# Altium PCB Tran_RF1.PcbDoc
Units mm, origin at the board's own origin, x right, y up, seen from the top; angles counter-clockwise.
Board outline 127 x 101.6 mm, 2 copper layers (Top Layer, Bottom Layer); 74 components, 22 nets, 332 pads, 18 vias.
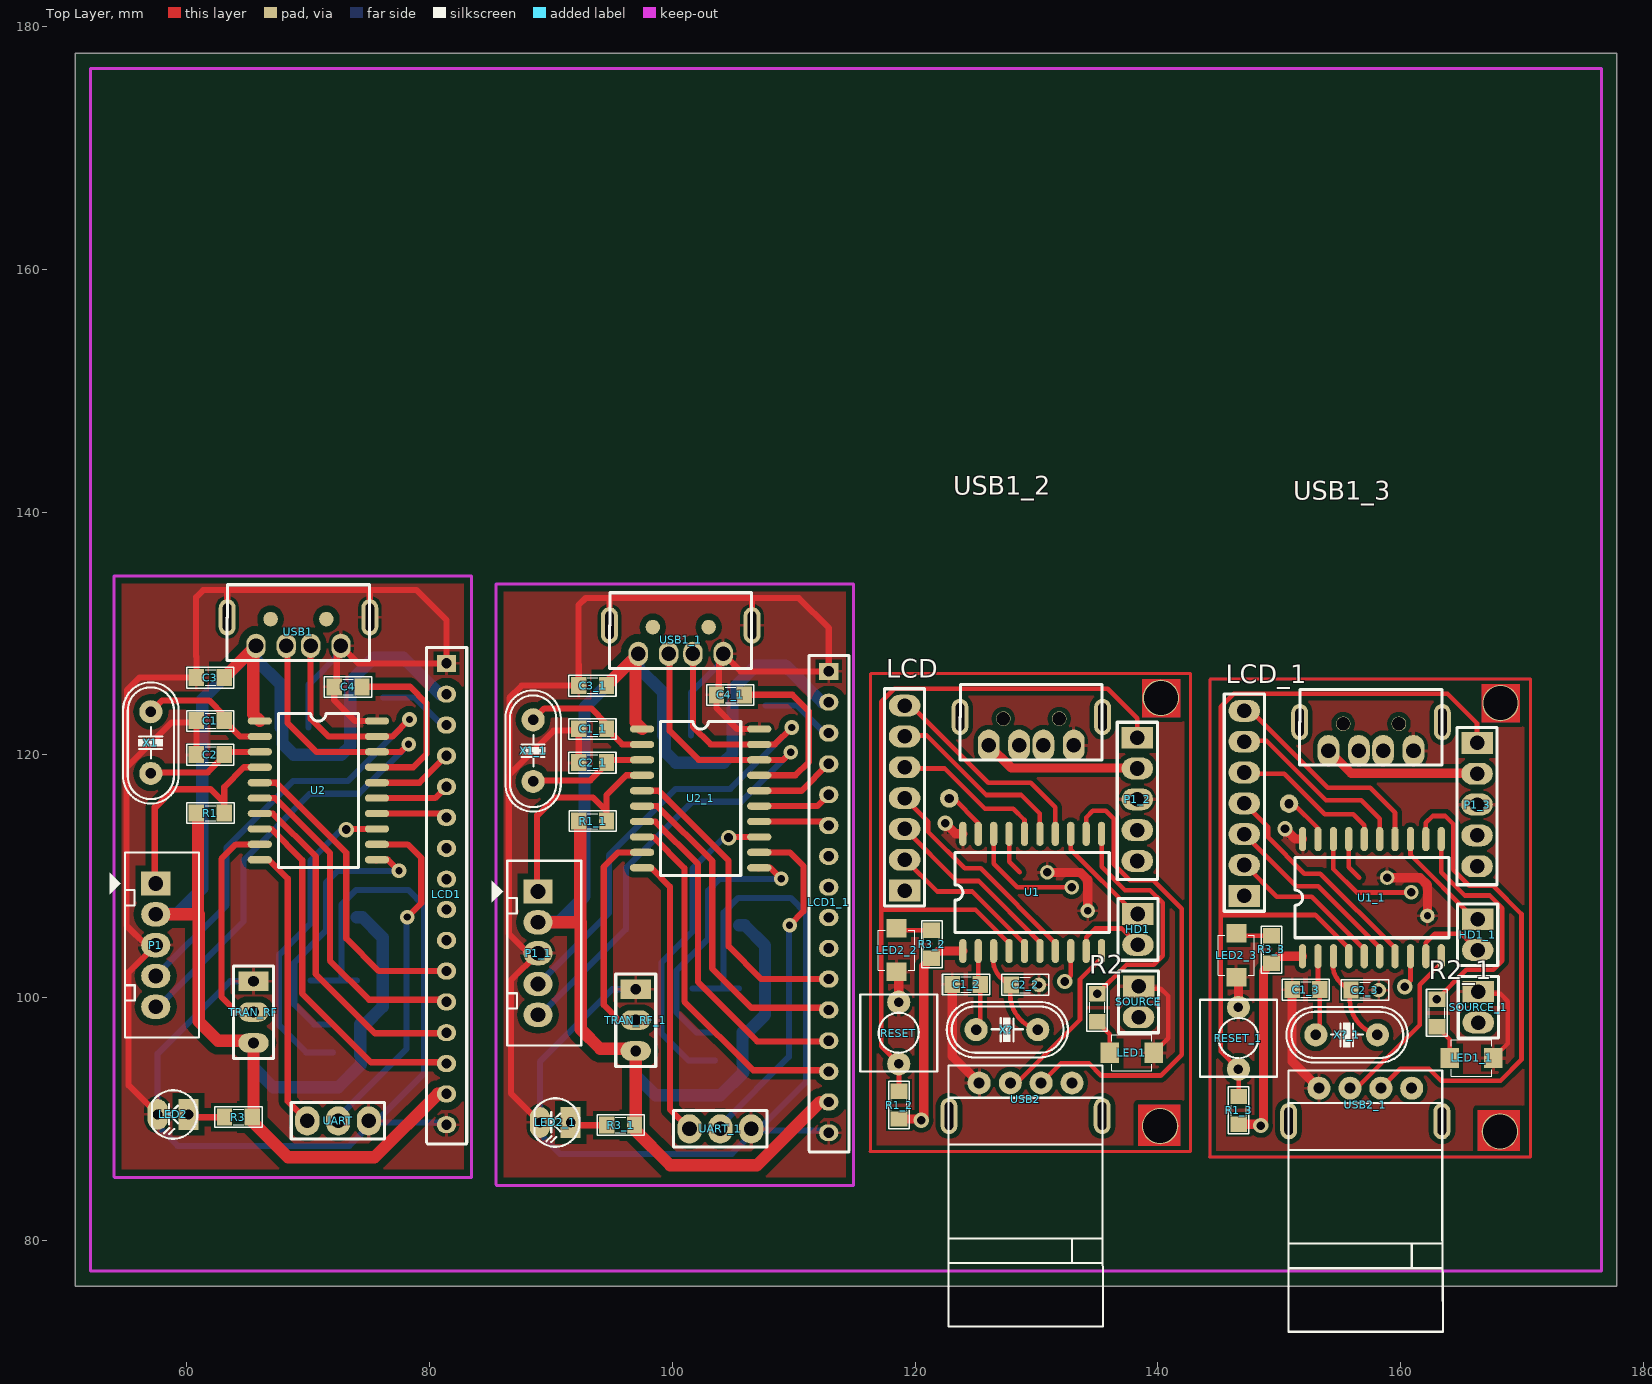
[diagram p0: Top Layer view]
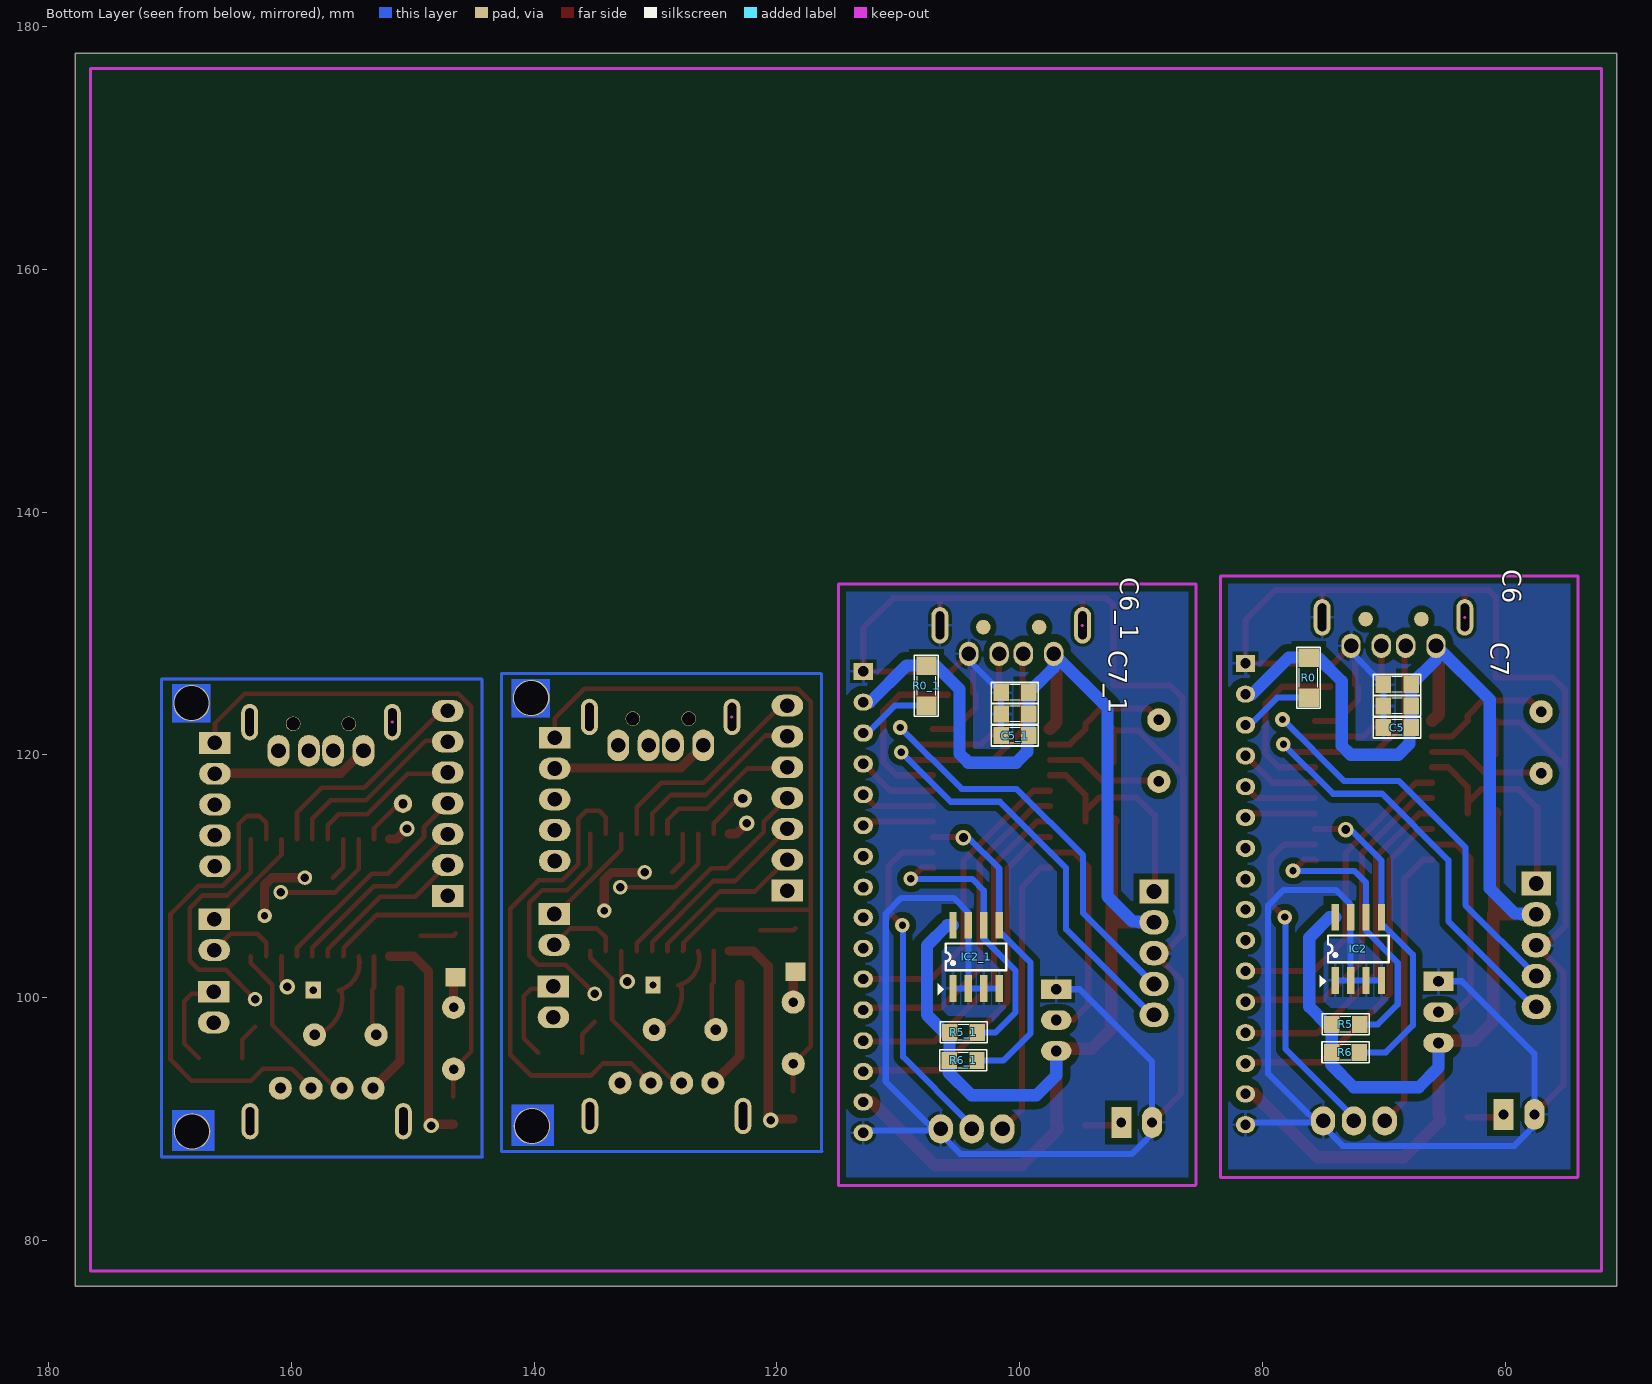
[diagram p1: Bottom Layer view, seen from below]
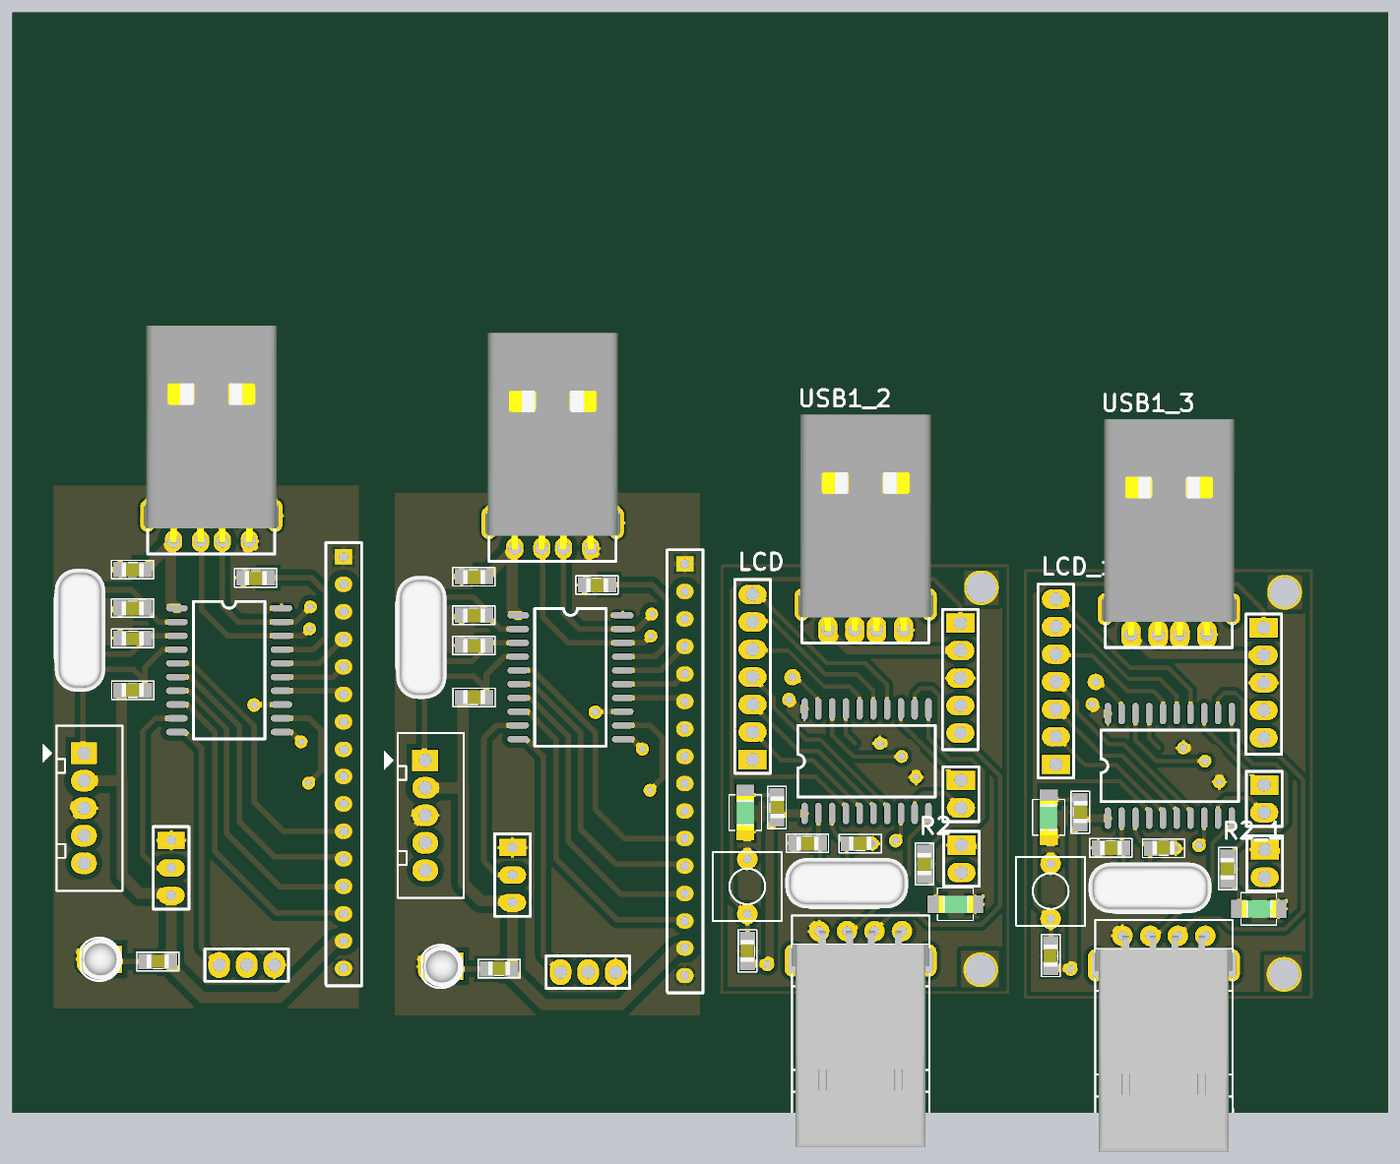
[diagram p2: 3D render of the assembled board from above, using the file's embedded part models]
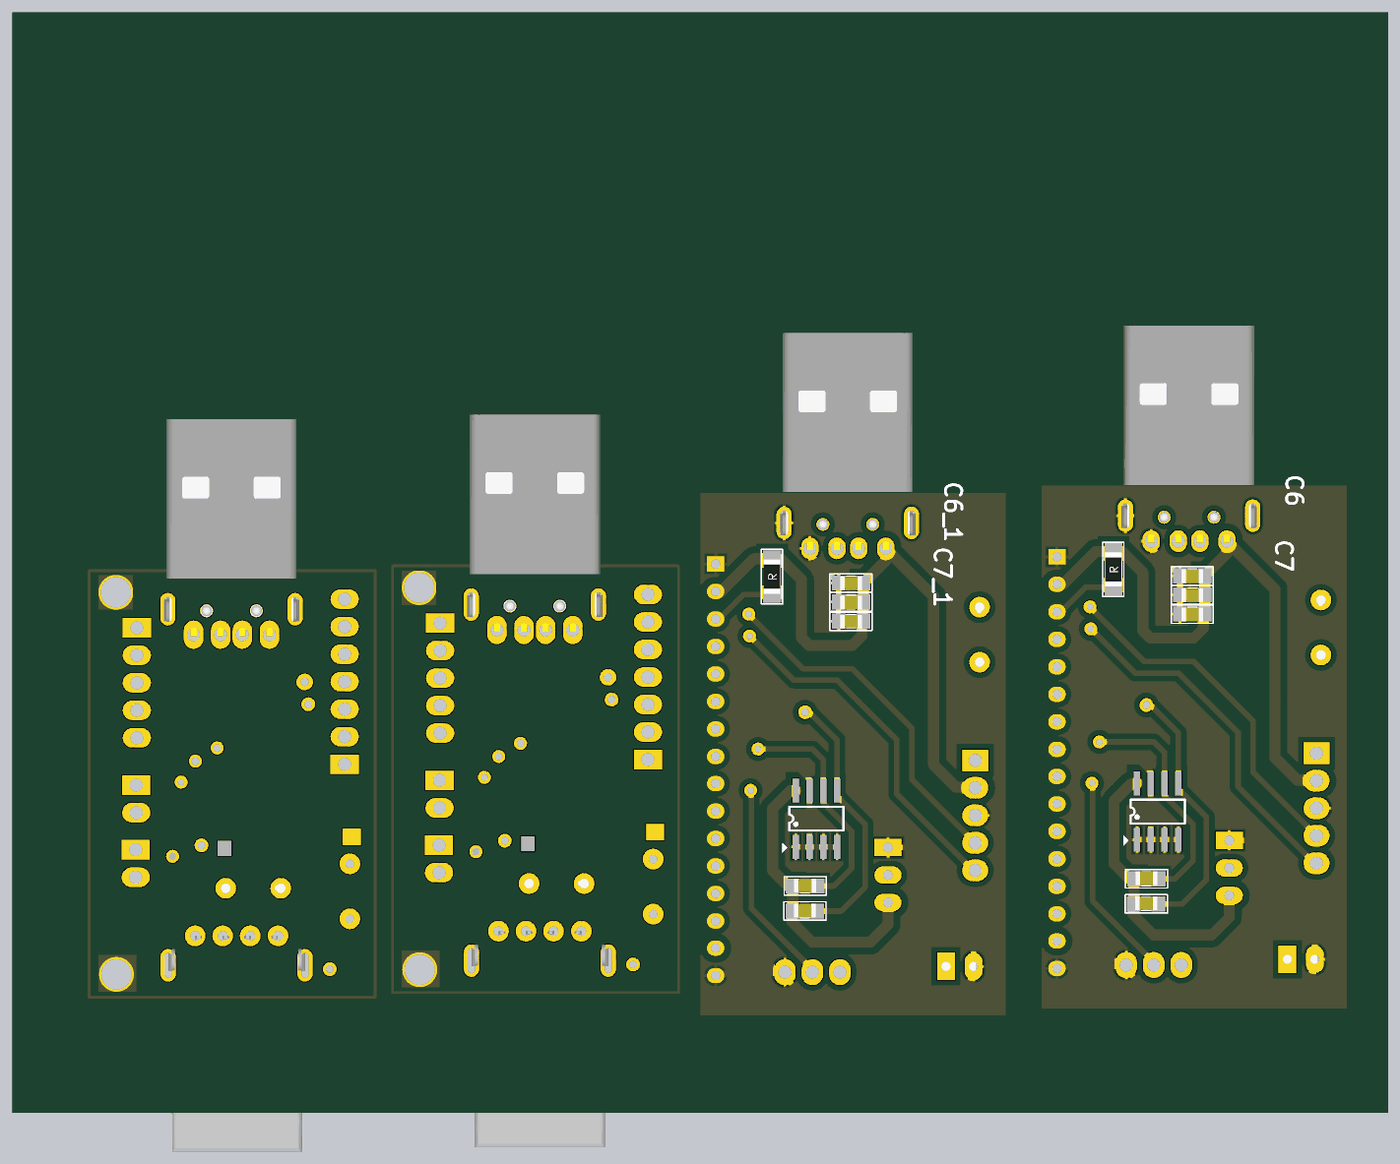
[diagram p3: 3D render of the assembled board from below, using the file's embedded part models]

## Layer stack, top to bottom
Top Layer: signal copper 0.0356
Dielectric: core 0.32, FR-4, Dk 4.8
Bottom Layer: signal copper 0.0356

## Board outline
50.8,76.2 177.8,76.2 177.8,177.8 50.8,177.8

## Design rules (kind name [scope] priority, off if disabled: settings)
Clearance VCC [InNet('VCC')] p1: gap=0.635
Clearance [All] p2: gap=0.508
PolygonConnect [All] p1: connectstyle=Relief reliefconductorwidth=0.254 reliefentries=4 polygonreliefangle="90 Angle" airgapwidth=0.254
RoomDefinition Tran_RF [InComponentClass('Tran_RF')] p1: confinementstyle=ConfineIn formatcopy=TRUE lockcomponents=FALSE outline 0,0 50.8,0 50.8,25.4 0,25.4
RoutingVias [All] p1: holewidth=0.635 width=1.016 viastyle="Through Hole" minholewidth=0.711 minwidth=1.27 maxholewidth=0.711 maxwidth=1.27
SolderMaskExpansion [All] p1: expansion=0.102
Width VCC_1 [InNet('VCC')] p1: maxlimit=1.016 minlimit=1.016 preferedwidth=1.016
Width [All] p2: maxlimit=0.508 minlimit=0.508 preferedwidth=0.508
28 further rules are at their usual default settings.

## Classes and differential pairs
component class Tran_RF: C1 C2 C3 C4 C5 C6 C7 IC2 LCD1 LED2 P1 R0 R1 R3 R5 R6 TRAN_RF U2 UART USB1 X1

## Components (designator, comment, footprint, x,y, rotation, side; value= is the part's Value field where it differs from the comment)
C1 "33pF" SM-0805#1 61.925,122.809 r0 top
C1_1 "33pF" SM-0805#1 93.421,122.149 r0 top (schematic designator C1)
C1_2 "33pF" SM-0805#1 124.206,101.092 r0 top (schematic designator C1)
C1_3 "33pF" SM-0805#1 152.197,100.66 r0 top (schematic designator C1)
C2 "33pF" SM-0805#1 61.925,120.015 r0 top
C2_1 "33pF" SM-0805#1 93.421,119.355 r0 top (schematic designator C2)
C2_2 "33pF" SM-0805#2 129.057,101.041 r180 top (schematic designator C2)
C2_3 "33pF" SM-0805#2 157.048,100.609 r180 top (schematic designator C2)
C3 "103" SM-0805#1 61.925,126.365 r0 top
C3_1 "103" SM-0805#1 93.421,125.705 r0 top (schematic designator C3)
C4 "103" SM-0805#1 73.279,125.603 r0 top
C4_1 "103" SM-0805#1 104.775,124.943 r0 top (schematic designator C4)
C5 "103" SM-0805#1 68.885,122.25 r180 bottom
C5_1 "103" SM-0805#1 100.381,121.59 r180 bottom (schematic designator C5)
C6 "103" SM-0805#1 68.885,124.028 r180 bottom
C6_1 "103" SM-0805#1 100.381,123.368 r180 bottom (schematic designator C6)
C7 "103" SM-0805#1 68.885,125.781 r180 bottom
C7_1 "103" SM-0805#1 100.381,125.12 r180 bottom (schematic designator C7)
HD1 "Header 2" HEADER1x2 138.354,106.883 r270 top
HD1_1 "Header 2" HEADER1x2 166.345,106.451 r270 top (schematic designator HD1)
IC2 "24Cxx" SO-G8 72.085,104.013 r180 bottom
IC2_1 "24Cxx" SO-G8 103.581,103.353 r180 bottom (schematic designator IC2)
LCD "Header 7H" HEADER1x7 119.126,108.814 r90 top
LCD1 "LCD16x2A" LCD 81.382,127.533 r270 top
LCD1_1 "LCD16x2A" LCD 112.878,126.873 r270 top (schematic designator LCD1)
LCD_1 "Header 7H" HEADER1x7 147.117,108.382 r90 top (schematic designator LCD)
LED1 "LED" SM-LED-Red#1 136.042,95.453 r0 top
LED1_1 "LED" SM-LED-Red#1 164.033,95.021 r0 top (schematic designator LED1)
LED2 "LED" LED-3 60.122,90.373 r180 top
LED2_1 "LED" LED-3 91.618,89.713 r180 top (schematic designator LED2)
LED2_2 "LED" SM-LED-Red#2 118.466,105.715 r270 top (schematic designator LED2)
LED2_3 "LED" SM-LED-Red#2 146.456,105.283 r270 top (schematic designator LED2)
P1 "MACH NAP" CON5 57.429,109.398 r270 top
P1_1 "MACH NAP" CON5 88.925,108.737 r270 top (schematic designator P1)
P1_2 "MACH NAP" HEADER1x5 138.303,121.412 r270 top (schematic designator P1)
P1_3 "MACH NAP" HEADER1x5 166.294,120.98 r270 top (schematic designator P1)
R0 "1k" SM-1206 76.175,126.365 r90 bottom
R0_1 "1k" SM-1206 107.671,125.705 r90 bottom (schematic designator R0)
R1 "10K" SM-0805#1 61.925,115.189 r180 top
R1_1 "10K" SM-0805#1 93.421,114.529 r180 top (schematic designator R1)
R1_2 "10K" SM-0805#1 118.669,91.135 r270 top (schematic designator R1)
R1_3 "10K" SM-0805#1 146.66,90.703 r270 top (schematic designator R1)
R2 "1k" SM-0805#1 135.001,99.162 r270 top
R2_1 "1k" SM-0805#1 162.992,98.73 r270 top (schematic designator R2)
R3 "220" SM-0805#1 64.237,90.145 r180 top
R3_1 "220" SM-0805#1 95.733,89.484 r180 top (schematic designator R3)
R3_2 "1k" SM-0805#1 121.361,104.394 r90 top (schematic designator R3)
R3_3 "1k" SM-0805#1 149.352,103.962 r90 top (schematic designator R3)
R5 "1k" SM-0805#1 73.127,97.79 r0 bottom
R5_1 "1k" SM-0805#1 104.623,97.13 r0 bottom (schematic designator R5)
R6 "1k" SM-0805#1 73.152,95.479 r0 bottom
R6_1 "1k" SM-0805#1 104.648,94.818 r0 bottom (schematic designator R6)
RESET "SW" SW2 118.643,99.619 r270 top
RESET_1 "SW" SW2 146.634,99.187 r270 top (schematic designator RESET)
SOURCE "Header 2" HEADER1x2 138.405,100.914 r270 top
SOURCE_1 "Header 2" HEADER1x2 166.395,100.482 r270 top (schematic designator SOURCE)
TRAN_RF "JP3" HEADER1x3 65.481,101.346 r270 top
TRAN_RF_1 "JP3" HEADER1x3 96.977,100.686 r270 top (schematic designator TRAN_RF)
U1 "PIC18F14K50-I/P" SOP-20 123.927,103.835 r90 top
U1_1 "PIC18F14K50-I/P" SOP-20 151.917,103.403 r90 top (schematic designator U1)
U2 "PIC18F14K50-I/P" SOP-20 66.005,122.784 r0 top
U2_1 "PIC18F14K50-I/P" SOP-20 97.501,122.123 r0 top (schematic designator U2)
UART "JP3" CON3 72.492,89.84 r180 top
UART_1 "JP3" CON3 103.988,89.179 r180 top (schematic designator UART)
USB1 "USB-S" USB-A-RA#1 69.19,129.057 r180 top
USB1_1 "USB-S" USB-A-RA#1 100.686,128.397 r180 top (schematic designator USB1)
USB1_2 "USB-S" USB-A-RA#2 129.565,120.853 r180 top (schematic designator USB1)
USB1_3 "USB-S" USB-A-RA#2 157.556,120.421 r180 top (schematic designator USB1)
USB2 "USB-S" USB-A 132.918,92.964 r180 top
USB2_1 "USB-S" USB-A 160.909,92.532 r180 top (schematic designator USB2)
X1 "8Mhz" XT2 57.023,121.006 r90 top
X1_1 "8Mhz" XT2 88.519,120.345 r90 top (schematic designator X1)
X? "4Mhz" XT2 127.559,97.358 r180 top
X?_1 "4Mhz" XT2 155.55,96.926 r180 top (schematic designator X?)

## Footprints (in the part's own frame and the unit in brackets; to place one, negate y for a bottom-side part, rotate by r counter-clockwise, add the part's x,y. Pads: shape width x height; smd on the part's side, far side on the other; paste and mask are expansions set on the pad)
CON3 [mm] "3-Pin Connector; pitch 2.54mm"
  oval 2x2.4 hole 1.2: 1(-2.5,0) 2(0.04,0) 3(2.58,0)
  silkscreen extent -3.8,-1.5 3.9,1.5
CON5 [mm] "CON5"
  rect 2x2.4 hole 1.2: 1(0,0)
  oval 2x2.4 hole 1.2: 2(2.54,0) 3(5.08,0) 4(7.62,0) 5(10.16,0)
  silkscreen extent -2.54,-3.8 12.7,3.56, body extent -2.63,-2.7 12.83,3.7, height 7
HEADER1x2 [mm]
  rect 1.8x2.6 hole 1.2: 1(0,0)
  oval 1.8x2.6 hole 1.2: 2(2.54,0)
  silkscreen extent -1.27,-1.65 3.81,1.65
HEADER1x3 [mm]
  rect 1.6x2.5 hole 0.9: 1(0,0)
  oval 1.6x2.5 hole 0.9: 2(2.54,0) 3(5.08,0)
  silkscreen extent -1.27,-1.65 6.35,1.65
HEADER1x5 [mm]
  rect 1.8x2.6 hole 1.2: 1(0,0)
  oval 1.8x2.6 hole 1.2: 2(2.54,0) 3(5.08,0) 4(7.62,0) 5(10.16,0)
  silkscreen extent -1.27,-1.65 11.68,1.65
HEADER1x7 [mm]
  rect 1.8x2.6 hole 1.2: 1(0,0)
  oval 1.8x2.6 hole 1.2: 2(2.54,0) 3(5.08,0) 4(7.62,0) 5(10.16,0) 6(12.7,0) 7(15.24,0)
  silkscreen extent -1.27,-1.65 16.63,1.65
LCD [mm]
  rect 1.4x1.6 hole 0.85 mask+0: 1(0,0)
  oval 1.4x1.6 hole 0.85 mask+0: 2(2.54,0) 3(5.08,0) 4(7.62,0) 5(10.16,0) 6(12.7,0) 7(15.24,0) 8(17.78,0) 9(20.28,0) 10(22.82,0) 11(25.351,0) 12(27.891,0) 13(30.431,0) 14(32.971,0) 15(35.471,0) 16(38.011,0)
  silkscreen extent -1.3,-1.63 39.61,1.67
LED-3 [mil] "LED 2 PIN, 3ly Only colour"
  rect 65x100 hole 32: 1(0,0)
  oval 65x100 hole 32: 2(100,0)
  silkscreen extent -29,-78 118,79, body extent -29,-75 109,75, height 256
SM-0805#1 [mil] "Compoment SMD 80x50mil"
  rect 50x55 smd: 1(-45,0) 2(45,0)
  silkscreen extent -77,-34 76,33, body extent -40,-27 40,23, height 24
SM-0805#2 [mil] "Compoment SMD 80x50mil"
  rect 50x55 smd far side: 1(-45,0)
  rect 50x55 smd: 2(45,0)
  silkscreen extent -77,-34 76,33, body extent -40,-27 40,23, height 24
SM-1206 [mil] "Compoment SMD 120x60mil"
  rect 60x65 smd: 1(-65,0) 2(65,0)
  silkscreen extent -99,-38 99,39, body extent -83,-35 83,36, height 25
SM-LED-Red#1 [mil]
  rect 60x65 smd: 1(0,0) 2(142,0)
  silkscreen extent 6,-59 136,59, body extent 10,-32 136,31, height 44
SM-LED-Red#2 [mil]
  rect 60x65 smd: 1(0,0)
  rect 60x65 all layers, no hole: 2(142,0)
  silkscreen extent 6,-59 136,59, body extent 10,-32 136,31, height 44
SO-G8 [mm] "Small Outline; 8 Leads; Body Width 3.9 mm; Pitch 1.27 mm"
  rect 0.6x2.2 smd: 1(-1.905,-2.6) 2(-0.635,-2.6) 3(0.635,-2.6) 4(1.905,-2.6) 5(1.905,2.6) 6(0.635,2.6) 7(-0.635,2.6) 8(-1.905,2.6)
  silkscreen extent -3.18,-3.17 2.5,1.1
SOP-20 [mm]
  oval 2x0.6 smd: 1(0,0) 2(0,-1.27) 3(0,-2.54) 4(0,-3.81) 5(0,-5.08) 6(0,-6.35) 7(0,-7.62) 8(0,-8.89) 9(0,-10.16) 10(0,-11.43) 11(9.652,-11.43) 12(9.652,-10.16) 13(9.652,-8.89) 14(9.652,-7.62) 15(9.652,-6.35) 16(9.652,-5.08) 17(9.652,-3.81) 18(9.652,-2.54) 19(9.652,-1.27) 20(9.652,0)
  silkscreen extent 1.52,-12.06 8.13,0.64
SW2 [mil] "SW button 2pin, 250x 250 mil"
  round 75 hole 31: 1(0,0) 2(200,0)
  silkscreen extent -25,-125 225,125
USB-A [mm]
  round 1.9 hole 0.9: 1(0,0) 2(2.54,0) 3(5.08,0) 4(7.645,0)
  oval 1.4x3 hole 0.7 slot 2.3 at 90 deg: 5(-2.489,2.718) 6(10.135,2.718)
  silkscreen extent -2.57,-1.45 10.19,20.07, body extent -2.47,-0.01 10.13,19.92, height 4.5
USB-A-RA#1 [mm] "USB Type A"
  oval 1.6x2 hole 1.2: 1(3.5,0.08) 2(1,0.08) 3(-1,0.08) 4(-3.5,0.08)
  oval 1.4x3 hole 0.7 slot 2.3 at 90 deg: HOLE(-5.875,-2.27) HOLE(5.875,-2.27)
  round 1.2 all layers, no hole: HOLE(-2.3,-2.13) HOLE(2.3,-2.13)
  Keep-Out Layer lines w0.254: 5.875,-2.27 5.842,-2.27
  silkscreen extent -5.84,-4.95 5.87,1.27, body extent -6.25,-19.8 6.25,0.23, height 2.18
USB-A-RA#2 [mm] "USB Type A"
  oval 1.8x2.6 hole 1.2: 1(3.5,0.08) 2(1,0.08) 3(-1,0.08) 4(-3.5,0.08)
  oval 1.4x3 hole 0.7 slot 2.3 at 90 deg: HOLE(-5.875,-2.27) HOLE(5.875,-2.27)
  round 1.2 hole 1.1: HOLE(-2.3,-2.13) HOLE(2.3,-2.13)
  Keep-Out Layer lines w0.254: 5.875,-2.27 5.842,-2.27
  silkscreen extent -5.84,-4.95 5.87,1.27, body extent -6.25,-19.8 6.25,0.23, height 2.18
XT2 [mil] "Footpin for Crystal 2 pin"
  round 75 hole 34: 1(-100,0) 2(100,0)
  silkscreen extent -198,-90 195,90, body extent -233,-93 213,90, height 138

## Part data
C1 C1_1 C1_2 C1_3 C2 C2_1 C2_2 C2_3 C3 C3_1 C4 C4_1 C5 C5_1 C6 C6_1 C7 C7_1: library part CM, "Cap SMD"
HD1 HD1_1 SOURCE SOURCE_1: library part Hed2, "Header 2 (Green)"
IC2 IC2_1: "Standard 2-Wire Bus Interface Serial EEPROM"
LCD LCD_1: "Header, 7-Pin, Right Angle"
LCD1 LCD1_1: library part LCD16x2, "LCD dipslay 16 char, 2 line"
LED1 LED1_1 LED2 LED2_1 LED2_2 LED2_3: "LED Single colour Green and Red"
P1 P1_1 P1_2 P1_3: library part "Header 5H", "Header, 5-Pin, Right Angle"
R0 R0_1 R1 R1_1 R1_2 R1_3 R2 R2_1 R3 R3_1 R3_2 R3_3 R5 R5_1 R6 R6_1: library part R, "Resistor 1/4W"
RESET RESET_1: library part SW2, "Switch button 2 pin"
TRAN_RF TRAN_RF_1 UART UART_1: library part Con3, "Connector 3"
U1 U1_1 U2 U2_1: "USB Flash Microcontroller with nanoWatt XLP Technology, 20-pin PDIP, Industrial Temperature"
USB1 USB1_1 USB1_2 USB1_3 USB2 USB2_1: library part USB_S, "USB connector"
X1 X1_1 X? X?_1: library part XT2, "Crystal For all Crystal 2pin."

## Free pads (board coordinates)
  round 3 hole 2.8: 0(140.183,89.408) 0(168.173,88.976) 1(140.233,124.689) 1(168.224,124.257)
  round 1.2 hole 0.6: 1(130.2,101.041) 1(158.191,100.609) 6(134.214,107.163) 6(162.204,106.731)
  round 1.2 hole 0.7: 2(130.886,110.312) 2(158.877,109.88) 4(135.001,100.305) 4(162.992,99.873)
  round 1.524 hole 0.762: 3(122.809,116.408) 3(150.8,115.976)

## Via types
v1: diameter 1.2, hole 0.6, Top Layer to Bottom Layer, 8 vias
v2: diameter 1.27, hole 0.711, Top Layer to Bottom Layer, 6 vias
v3: diameter 1.2, hole 0.7, Top Layer to Bottom Layer, 2 vias
v4: diameter 1.27, hole 0.7, Top Layer to Bottom Layer, 2 vias

## Nets (pads, with @x,y where several pads share a name; then routed paths per layer and width w, separated by ;. In a path a pad name is that pad's centre, name@x,y a point inside that pad or via, vN(x,y) a via of type N, cw(c..) or ccw(c..) an arc to the next point about the centre after c; other vN are vias at no path point)
D4: LCD1.11 U2.5 | length 25.9
  Top Layer w0.508: U2.5 67.361,117.704 73.127,111.938 73.127,104.877 75.821,102.182 LCD1.11
D5: LCD1.12 U2.6 | length 27.5
  Top Layer w0.508: U2.6 67.259,116.434 71.78,111.912 71.78,103.048 75.006,99.822 81.202,99.822 LCD1.12
D6: LCD1.13 U2.7 | length 28.6
  Top Layer w0.508: U2.7 67.081,115.164 70.612,111.633 70.612,101.93 75.489,97.053 81.333,97.053 LCD1.13
D7: LCD1.14 U2.8 | length 29.8
  Top Layer w0.508: U2.8 66.929,113.894 69.494,111.328 69.494,100.33 75.159,94.666 81.278,94.666 LCD1.14
D+/PGD: P1.4 U2.19 USB1.3 | length 47.8
  Top Layer w0.508: USB1.3 70.19,122.977 71.653,121.514 U2.19 76.937,121.514 v1(78.334,122.911)
  Bottom Layer w0.508: P1.4 63.271,107.62 63.271,112.37 68.758,117.856 73.279,117.856 v1(78.334,122.911)
D-/PGC: P1.5 U2.18 USB1.2 | length 50.4
  Top Layer w0.508: USB1.2 68.275,128.892 68.275,122.631 70.663,120.244 U2.18 77.622,120.244 v1(78.257,120.879)
  Bottom Layer w0.508: P1.5 57.633,99.238 64.668,106.274 64.668,111.328 70.129,116.789 74.168,116.789 v1(78.257,120.879)
EN: LCD1.6 U2.14 | length 5.4
  Top Layer w0.508: U2.14 LCD1.6@81.051,115.164
GND: C1.1 C2.1 C3.1 C4.1 C5.1 C6.1 C7.1 IC2.1 IC2.2 IC2.3 IC2.4 IC2.7 LCD1.1 LCD1.16 LED2.2 P1.3 TRAN_RF.1 U2.20 UART.1 USB1.4 USB1.HOLE@63.315,131.327 USB1.HOLE@75.065,131.327 | length 196.9
  Top Layer w0.508: LED2.2 55.194,92.761 55.194,102.083 P1.3 56.636,104.318 55.016,105.937 55.016,118.948 55.067,118.999 ; C2.1 C1.1@60.782,122.657 ; C1.1 C1.1@60.782,122.657 ; C1.1@60.935,122.733 60.858,122.657 C1.1@60.782,122.657 ; USB1.HOLE@63.315,131.327 63.315,133.571 63.322,133.579 ; USB1.HOLE@75.065,131.327 75.065,133.535 75.108,133.579 ; U2.20 73.863,122.784 72.136,124.511 C4.1 72.339,125.806 72.339,128.627 USB1.4 74.134,127.533 LCD1.1 81.382,131.115 78.918,133.579 75.108,133.579 ; 55.067,118.999 58.725,122.657 C1.1@60.782,122.657 ; 55.067,118.999 55.067,125.349 56.083,126.365 C3.1 60.782,128.092 60.757,128.118 60.757,132.994 61.341,133.579 63.322,133.579 ; 63.322,133.579 75.108,133.579
  Bottom Layer w0.508: TRAN_RF.1@65.548,101.413 TRAN_RF.1 63.551,101.346 57.582,95.377 LED2.2 57.582,89.433 59.233,87.782 73.391,87.782 74.992,89.383 UART.1 UART.1@75.55,89.84 ; C5.1 C6.1 C7.1 72.69,128.443 USB1.4 ; IC2.4 IC2.3 IC2.2 ; IC2.1 IC2.2 ; LCD1.16 81.191,89.713 75.677,89.713 UART.1@75.55,89.84 ; IC2.2 IC2.7 72.72,107.645 73.939,108.864 78.232,108.864 79.527,107.569 79.527,93.726 75.641,89.84 UART.1@75.55,89.84
MCLR: P1.1 R1.1 U2.4 | length 18.9
  Top Layer w0.508: P1.1 57.353,109.474 57.353,115.697 57.417,115.697 58.877,117.157 61.943,117.157 63.068,116.033 ; R1.1 63.068,116.033 ; U2.4 64.694,118.974 63.068,117.348 63.068,116.033
NetC4_2: C4.2 U2.17 | length 14.6
  Top Layer w0.508: C4.2 78.384,125.603 79.731,124.257 79.731,120.066 78.638,118.974 U2.17
NetLED2_1: LED2.1 R3.2 | length 3.1
  Top Layer w0.508: LED2.1 60.35,90.145 R3.2
OSC1: C1.2 U2.2 X1.2 | length 10.9
  Top Layer w0.508: X1.2 57.96,124.483 61.821,124.483 63.068,123.235 C1.2 64.364,121.514 U2.2
OSC2: C2.2 U2.3 X1.1 | length 9.7
  Top Layer w0.508: X1.1 57.112,118.554 61.733,118.554 63.422,120.244 U2.3
RS: LCD1.4 U2.16 | length 6.6
  Top Layer w0.508: U2.16 79.146,117.704 81.356,119.913 LCD1.4
RW: LCD1.5 U2.15 | length 6.1
  Top Layer w0.508: U2.15 80.442,116.434 LCD1.5
RX: U2.12 UART.2 | length 28.7
  Top Layer w0.508: U2.12 78.181,112.624 79.299,111.506 79.299,107.772 v1(78.156,106.629)
  Bottom Layer w0.508: UART.2@72.68,89.611 72.68,90.359 78.098,95.776 78.098,106.571 v1(78.156,106.629)
SCL: IC2.6 R5.1 U2.11 | length 23.7
  Top Layer w0.508: U2.11@75.59,111.287 U2.11 76.556,111.354 v1(77.47,110.439)
  Bottom Layer w0.508: R5.1 70.485,97.79 68.834,99.441 68.834,102.87 71.45,105.486 IC2.6 71.45,109.474 72.415,110.439 v1(77.47,110.439)
SDA: IC2.5 R6.1 U2.13 | length 26.6
  Top Layer w0.508: v2(73.127,113.843) 73.177,113.894 U2.13
  Bottom Layer w0.508: R6.1 69.825,95.479 67.589,97.714 67.589,103.53 70.18,106.121 IC2.5 70.18,111.303 72.72,113.843 v2(73.127,113.843)
TRAN_RF: TRAN_RF.2 U2.9 | length 18.2
  Top Layer w0.508: TRAN_RF.2 64.084,98.806 62.84,100.051 62.84,111.43 64.033,112.624 U2.9
TX: U2.10 UART.3 | length 23.6
  Top Layer w0.508: U2.10 66.751,111.354 68.301,109.804 68.301,91.451 UART.3
VCC: C3.2 C5.2 C6.2 C7.2 IC2.8 LCD1.2 LCD1.15 P1.2 R0.2 R1.2 R3.1 R5.2 R6.2 TRAN_RF.3 U2.1 USB1.1 | length 146.4
  Top Layer w1.016: P1.2 60.96,106.858 ; R1.2 60.909,115.062 60.909,106.909 60.96,106.858 ; C3.2 65.447,128.744 65.456,128.744 65.456,123.333 U2.1 ; LCD1.15 80.676,92.062 75.457,86.843 68.326,86.843 65.38,89.789 R3.1 65.481,90.246 TRAN_RF.3 65.303,96.444 62.56,96.444 60.96,98.044 60.96,106.858
  Bottom Layer w1.016: 58.649,106.858 P1.2 57.493,106.921 59.204,106.921 61.265,108.982 61.265,124.553 USB1.1 65.69,127.833 C7.2 C6.2 C5.2 67.869,122.123 67.869,120.92 68.774,120.015 72.72,120.015 73.457,120.752 73.457,126.06 75.413,128.016 R0.2 77.826,128.016 80.848,124.993 LCD1.2 ; TRAN_RF.3 65.481,94.234 67.107,92.608 72.466,92.608 74.346,94.488 74.346,95.174 74.27,95.25 R5.2 74.676,97.79 76.124,99.238 76.124,104.953 74.464,106.613 IC2.8
VSS: LCD1.3 R0.1 | length 6.1
  Bottom Layer w0.508: R0.1 78.775,124.714 81.036,122.453 LCD1.3
pads on no net: C1_1.1 C1_1.2 C1_2.1 C1_2.2 C1_3.1 C1_3.2 C2_1.1 C2_1.2 C2_2.1 C2_2.2 C2_3.1 C2_3.2 C3_1.1 C3_1.2 C4_1.1 C4_1.2 C5_1.1 C5_1.2 C6_1.1 C6_1.2 C7_1.1 C7_1.2 HD1.1 HD1.2 HD1_1.1 HD1_1.2 IC2_1.1 IC2_1.2 IC2_1.3 IC2_1.4 IC2_1.5 IC2_1.6 IC2_1.7 IC2_1.8 LCD1.7 LCD1.8 LCD1.9 LCD1.10 LCD1_1.1 LCD1_1.2 LCD1_1.3 LCD1_1.4 LCD1_1.5 LCD1_1.6 LCD1_1.7 LCD1_1.8 LCD1_1.9 LCD1_1.10 LCD1_1.11 LCD1_1.12 LCD1_1.13 LCD1_1.14 LCD1_1.15 LCD1_1.16 LCD.1 LCD.2 LCD.3 LCD.4 LCD.5 LCD.6 LCD.7 LCD_1.1 LCD_1.2 LCD_1.3 LCD_1.4 LCD_1.5 LCD_1.6 LCD_1.7 LED1.1 LED1.2 LED1_1.1 LED1_1.2 LED2_1.1 LED2_1.2 LED2_2.1 LED2_2.2 LED2_3.1 LED2_3.2 P1_1.1 P1_1.2 P1_1.3 P1_1.4 P1_1.5 P1_2.1 P1_2.2 P1_2.3 P1_2.4 P1_2.5 P1_3.1 P1_3.2 P1_3.3 P1_3.4 P1_3.5 R0_1.1 R0_1.2 R1_1.1 R1_1.2 R1_2.1 R1_2.2 R1_3.1 R1_3.2 R2.1 R2.2 R2_1.1 R2_1.2 R3_1.1 R3_1.2 R3_2.1 R3_2.2 R3_3.1 R3_3.2 R5_1.1 R5_1.2 R6_1.1 R6_1.2 RESET.1 RESET.2 RESET_1.1 RESET_1.2 SOURCE.1 SOURCE.2 SOURCE_1.1 SOURCE_1.2 TRAN_RF_1.1 TRAN_RF_1.2 TRAN_RF_1.3 U1.1 U1.2 U1.3 U1.4 U1.5 U1.6 U1.7 U1.8 U1.9 U1.10 U1.11 U1.12 U1.13 U1.14 U1.15 U1.16 U1.17 U1.18 U1.19 U1.20 U1_1.1 U1_1.2 U1_1.3 U1_1.4 U1_1.5 U1_1.6 U1_1.7 U1_1.8 U1_1.9 U1_1.10 U1_1.11 U1_1.12 U1_1.13 U1_1.14 U1_1.15 U1_1.16 U1_1.17 U1_1.18 U1_1.19 U1_1.20 U2_1.1 U2_1.2 U2_1.3 U2_1.4 U2_1.5 U2_1.6 U2_1.7 U2_1.8 U2_1.9 U2_1.10 U2_1.11 U2_1.12 U2_1.13 U2_1.14 U2_1.15 U2_1.16 U2_1.17 U2_1.18 U2_1.19 U2_1.20 UART_1.1 UART_1.2 UART_1.3 USB1.HOLE@66.89,131.187 USB1.HOLE@71.49,131.187 USB1_1.1 USB1_1.2 USB1_1.3 USB1_1.4 USB1_1.HOLE USB1_2.1 USB1_2.2 USB1_2.3 USB1_2.4 USB1_2.HOLE USB1_3.1 USB1_3.2 USB1_3.3 USB1_3.4 USB1_3.HOLE USB2.1 USB2.2 USB2.3 USB2.4 USB2.5 USB2.6 USB2_1.1 USB2_1.2 USB2_1.3 USB2_1.4 USB2_1.5 USB2_1.6 X1_1.1 X1_1.2 X?.1 X?.2 X?_1.1 X?_1.2
copper on no net: | length 1456.7
  Top Layer w0.381: 117.284,107.188 117.335,107.239 124.968,107.239 127.686,104.521 127.686,103.886 127.737,103.835 ; 118.466,105.715 118.643,105.537 121.361,105.537 ; 118.669,92.278 118.669,94.513 118.643,94.539 117.196,95.987 117.196,124.384 118.262,125.451 135.865,125.451 138.303,123.012 138.303,121.412 ; 119.126,111.354 119.193,111.354 121.809,108.737 124.689,108.737 129.007,104.419 129.007,103.835 ; 119.126,113.894 123.419,109.601 125.222,109.601 130.277,104.546 130.277,103.835 ; 119.126,116.434 121.082,114.478 121.082,113.64 124.079,110.642 125.386,110.642 131.547,104.482 131.547,103.835 ; 120.218,118.872 122.428,118.872 125.755,115.545 128.092,115.545 129.007,114.63 129.007,113.487 ; 120.218,121.59 120.955,121.59 125.857,116.688 128.753,116.688 130.277,115.164 130.277,113.487 ; 120.218,123.495 126.009,117.704 129.515,117.704 131.547,115.672 131.547,113.487 ; 122.809,116.408 123.165,116.408 125.197,114.376 125.197,113.487 ; 125.019,97.358 125.349,97.688 125.349,101.092 ; 125.197,101.244 125.197,103.835 ; 126.467,103.835 ccw(c128.702,103.251) 128.118,101.016 ; 126.467,113.487 126.467,111.023 128.397,109.093 v3(132.893,109.093) ; 127.737,113.487 127.737,111.176 128.6,110.312 ; 127.838,92.964 128.372,92.964 133.579,98.171 133.579,101.498 135.357,103.276 135.357,103.835 ; 127.914,101.041 ccw(c130.848,100.292) 130.099,97.358 ; 130.378,92.964 131.978,94.564 134.341,94.564 135.331,93.574 140.233,93.574 141.961,95.301 141.961,107.315 139.624,109.652 137.668,109.652 136.347,110.973 136.347,114.732 135.687,115.392 134.645,115.392 134.087,114.833 134.087,113.487 ; v2(132.334,101.321) 132.817,101.803 132.817,103.835 ; 132.817,113.487 132.817,112.192 138.125,106.883 138.354,106.883 ; 134.087,103.835 134.087,104.953 134.823,105.689 137.008,105.689 138.354,104.343 ; 135.001,98.019 136.042,96.977 136.042,95.453 ; 135.001,100.305 137.414,102.718 139.649,102.718 140.386,103.454 140.386,107.798 139.344,108.839 137.287,108.839 135.357,110.769 135.357,113.487 ; 137.668,111.252 138.303,111.252 ; 138.405,100.914 138.582,100.736 140.233,100.736 140.843,100.127 140.843,96.647 139.649,95.453 ; 145.275,106.756 145.326,106.807 152.959,106.807 155.677,104.089 155.677,103.454 155.727,103.403 ; 146.456,105.283 146.634,105.105 149.352,105.105 ; 146.66,91.846 146.66,94.082 146.634,94.107 145.186,95.555 145.186,123.952 146.253,125.019 163.855,125.019 166.294,122.58 166.294,120.98 ; 147.117,110.922 147.184,110.922 149.8,108.306 152.679,108.306 156.997,103.988 156.997,103.403 ; 147.117,113.462 151.409,109.169 153.213,109.169 158.267,104.115 158.267,103.403 ; 147.117,116.002 149.073,114.046 149.073,113.208 152.07,110.211 153.377,110.211 159.537,104.05 159.537,103.403 ; 148.209,118.44 150.419,118.44 153.746,115.113 156.083,115.113 156.997,114.198 156.997,113.055 ; 148.209,121.158 148.946,121.158 153.848,116.256 156.743,116.256 158.267,114.732 158.267,113.055 ; 148.209,123.063 154,117.272 157.505,117.272 159.537,115.24 159.537,113.055 ; 150.8,115.976 151.155,115.976 153.187,113.944 153.187,113.055 ; 153.01,96.926 153.34,97.257 153.34,100.66 ; 153.187,100.813 153.187,103.403 ; 154.457,103.403 ccw(c156.693,102.819) 156.108,100.584 ; 154.457,113.055 154.457,110.592 156.388,108.661 v3(160.884,108.661) ; 155.727,113.055 155.727,110.744 156.591,109.88 ; 155.829,92.532 156.362,92.532 161.569,97.739 161.569,101.067 163.347,102.845 163.347,103.403 ; 155.905,100.609 ccw(c158.839,99.86) 158.09,96.926 ; 158.369,92.532 159.969,94.132 162.331,94.132 163.322,93.142 168.224,93.142 169.951,94.869 169.951,106.883 167.615,109.22 165.659,109.22 164.338,110.541 164.338,114.3 163.678,114.96 162.636,114.96 162.077,114.402 162.077,113.055 ; v2(160.325,100.889) 160.807,101.371 160.807,103.403 ; 160.807,113.055 160.807,111.76 166.116,106.451 166.345,106.451 ; 162.077,103.403 162.077,104.521 162.814,105.258 164.998,105.258 166.345,103.911 ; 162.992,97.587 164.033,96.545 164.033,95.021 ; 162.992,99.873 165.405,102.286 167.64,102.286 168.377,103.022 168.377,107.366 167.335,108.407 165.278,108.407 163.347,110.338 163.347,113.055 ; 165.659,110.82 166.294,110.82 ; 166.395,100.482 166.573,100.305 168.224,100.305 168.834,99.695 168.834,96.215 167.64,95.021
  Top Layer w0.508: 88.519,117.805 88.608,117.894 93.229,117.894 94.918,119.583 97.501,119.583 ; 88.519,122.885 89.456,123.822 93.317,123.822 94.564,122.575 94.564,122.149 95.86,120.853 97.501,120.853 ; 88.925,108.737 88.849,108.814 88.849,115.037 88.913,115.037 90.373,116.497 93.439,116.497 94.564,115.372 ; 89.078,89.713 86.69,92.1 86.69,101.422 88.925,103.657 88.132,103.657 86.512,105.277 86.512,118.288 86.563,118.339 ; 91.618,89.713 91.846,89.484 94.59,89.484 ; 92.278,119.355 92.278,121.996 ; 92.278,122.149 92.278,121.996 ; 92.431,122.072 92.354,121.996 92.278,121.996 ; 94.564,114.529 94.564,115.372 ; 94.811,130.667 94.811,132.911 94.818,132.918 ; 96.977,98.146 95.58,98.146 94.336,99.39 94.336,110.769 95.529,111.963 97.501,111.963 ; 97.501,110.693 98.247,110.693 99.797,109.144 99.797,90.79 101.408,89.179 ; 97.501,113.233 98.425,113.233 100.99,110.668 100.99,99.67 106.655,94.005 112.774,94.005 112.878,93.902 ; 97.501,114.503 98.577,114.503 102.108,110.973 102.108,101.27 106.985,96.393 112.829,96.393 112.878,96.442 ; 97.501,115.773 98.755,115.773 103.276,111.252 103.276,102.387 106.502,99.162 112.698,99.162 112.878,98.982 ; 97.501,117.043 98.857,117.043 104.623,111.277 104.623,104.216 107.317,101.522 112.878,101.522 ; 97.501,118.313 96.19,118.313 94.564,116.688 94.564,115.372 ; 99.686,128.317 99.771,128.231 99.771,121.971 102.159,119.583 107.153,119.583 109.118,119.583 v1(109.753,120.218) ; 101.686,128.317 101.686,122.317 103.149,120.853 107.153,120.853 108.433,120.853 v1(109.83,122.25) ; v2(104.623,113.182) 104.673,113.233 107.153,113.233 ; 105.918,124.943 109.88,124.943 111.227,123.596 111.227,119.405 110.134,118.313 107.153,118.313 ; 106.561,130.667 106.561,132.875 106.604,132.918 ; 107.086,110.626 107.153,110.693 108.052,110.693 v1(108.966,109.779) ; 107.153,111.963 109.677,111.963 110.795,110.846 110.795,107.112 v1(109.652,105.969) ; 107.153,114.503 112.547,114.503 ; 107.153,115.773 111.938,115.773 112.878,116.713 ; 107.153,117.043 110.642,117.043 112.852,119.253 112.878,119.253 ; 107.153,122.123 105.359,122.123 103.632,123.85 103.632,124.943 103.835,125.146 103.835,127.967 104.186,128.317 105.63,126.873 112.878,126.873 112.878,130.454 110.414,132.918 106.604,132.918 ; 86.563,118.339 86.563,124.689 87.579,125.705 92.278,125.705 92.278,127.432 92.253,127.457 92.253,132.334 92.837,132.918 94.818,132.918 ; 86.563,118.339 90.221,121.996 92.278,121.996 ; 94.818,132.918 106.604,132.918
  Top Layer w0.762: 118.466,102.108 118.643,101.93 118.643,99.619 ; 118.669,89.992 v4@120.396,89.992 ; v4(120.498,89.891) 120.701,90.094 120.701,102.591 121.361,103.251 121.945,103.835 123.927,103.835 ; v2(122.479,114.351) 123.342,113.487 123.927,113.487 ; 123.063,101.092 123.063,95.174 125.273,92.964 ; 126.065,120.773 127.928,118.91 138.265,118.91 138.303,118.872 ; 131.023,110.176 130.886,110.312 133.601,110.312 134.214,109.699 134.214,107.163 ; 138.405,100.914 139.09,100.914 ; 146.456,101.676 146.634,101.498 146.634,99.187 ; 146.66,89.56 v4@148.387,89.56 ; v4(148.488,89.459) 148.692,89.662 148.692,102.159 149.352,102.819 149.936,103.403 151.917,103.403 ; v2(150.47,113.919) 151.333,113.055 151.917,113.055 ; 151.054,100.66 151.054,94.742 153.264,92.532 ; 154.056,120.341 155.919,118.478 166.256,118.478 166.294,118.44 ; 159.014,109.744 158.877,109.88 161.591,109.88 162.204,109.267 162.204,106.731 ; 166.395,100.482 167.081,100.482
  Top Layer w1.016: 88.925,106.197 92.456,106.197 ; 92.278,114.529 92.405,114.402 92.405,106.248 92.456,106.197 ; 94.564,125.705 96.943,128.083 96.952,128.083 96.952,122.673 97.501,122.123 ; 112.878,91.402 112.172,91.402 106.953,86.182 99.822,86.182 96.876,89.129 96.876,89.484 96.977,89.586 96.977,95.606 96.799,95.783 94.056,95.783 92.456,97.384 92.456,106.197
  Bottom Layer w0.508: 88.925,98.577 89.129,98.577 96.164,105.613 96.164,110.668 101.625,116.129 105.664,116.129 v1(109.753,120.218) ; 88.925,101.117 94.767,106.959 94.767,111.709 100.254,117.196 104.775,117.196 v1(109.83,122.25) ; 97.044,100.753 96.977,100.686 95.047,100.686 89.078,94.717 89.078,89.713 89.078,88.773 90.729,87.122 104.887,87.122 106.488,88.722 106.488,89.179 107.046,89.179 ; 101.524,121.59 101.524,123.368 101.524,125.12 104.186,127.782 104.186,128.317 ; 101.676,100.753 102.946,100.753 104.216,100.753 ; 103.48,97.13 101.981,97.13 100.33,98.781 100.33,102.21 102.946,104.826 102.946,105.953 102.946,108.814 103.911,109.779 v1(108.966,109.779) ; 103.505,94.818 101.321,94.818 99.085,97.053 99.085,102.87 101.676,105.461 101.676,105.953 101.676,110.642 104.216,113.182 v2(104.623,113.182) ; 104.176,88.951 104.176,89.698 109.594,95.116 109.594,105.911 v1(109.652,105.969) ; 105.486,100.753 104.216,100.753 ; 107.671,124.054 110.271,124.054 112.532,121.793 112.878,121.793 ; 112.878,88.862 112.687,89.052 107.173,89.052 107.046,89.179 ; 104.216,100.753 104.216,105.953 104.216,106.985 105.435,108.204 109.728,108.204 111.023,106.909 111.023,93.066 107.137,89.179 107.046,89.179
  Bottom Layer w1.016: 90.145,106.197 88.925,106.197 88.989,106.261 90.7,106.261 92.761,108.322 92.761,123.892 97.186,128.317 97.186,127.173 99.238,125.12 99.238,123.368 99.238,121.59 99.365,121.463 99.365,120.26 100.27,119.355 104.216,119.355 104.953,120.091 104.953,125.4 106.909,127.356 107.671,127.356 109.322,127.356 112.344,124.333 112.878,124.333 ; 96.977,95.606 96.977,93.574 98.603,91.948 103.962,91.948 105.842,93.828 105.842,94.513 105.766,94.59 105.766,97.13 106.172,97.13 107.62,98.577 107.62,104.292 105.96,105.953 105.486,105.953

## Polygon pours and split planes (outlines as drawn)
no net on Top Layer "Top Layer-No Net" (solid, remove dead copper, pour order 24): 170.688,126.263 170.688,86.868 170.663,86.893 144.297,86.893 144.297,126.035 144.526,126.263 170.688,126.263
no net on Top Layer "Top Layer-No Net" (solid, remove dead copper, pour order 24): 142.697,126.695 142.697,87.3 142.672,87.325 116.307,87.325 116.307,126.467 116.535,126.695 142.697,126.695
no net on Top Layer "Top Layer-No Net" (solid, remove dead copper, pour order 6): 85.268,84.861 85.471,85.065 85.471,134.087 114.833,134.087 114.935,133.985 114.935,84.531 85.522,84.531 85.471,84.582
GND on Top Layer "Top Layer-No Net" (solid, remove dead copper, pour order 6): 53.772,85.522 53.975,85.725 53.975,134.747 83.337,134.747 83.439,134.645 83.439,85.192 54.026,85.192 53.975,85.242
no net on Bottom Layer "Top Layer-No Net" (solid, remove dead copper, pour order 8): 85.522,84.531 114.935,84.531 114.935,133.934 114.783,134.087 85.471,134.087 85.471,84.582
GND on Bottom Layer "Top Layer-No Net" (solid, remove dead copper, pour order 8): 54.026,85.192 83.439,85.192 83.439,134.595 83.287,134.747 53.975,134.747 53.975,85.242

## Keep-outs
Keep-Out Layer:
  lines w0.254: 52.07,77.47 52.07,176.53 176.53,176.53 176.53,77.47 52.07,77.47 ; 53.975,85.242 53.975,86.919 53.975,134.747 83.287,134.747 83.439,134.747 83.439,132.309 83.439,85.192 54.305,85.192 54.026,85.192 53.975,85.242 ; 85.471,84.582 85.522,84.531 85.801,84.531 114.935,84.531 114.935,131.648 114.935,134.087 114.783,134.087 85.471,134.087 85.471,86.258 85.471,84.582

## Other copper
Multi-Layer:
  region: 166.345,90.754 166.345,87.351 169.85,87.351 169.85,90.754
  region: 166.675,125.832 166.675,122.657 169.85,122.657 169.85,125.832
  region: 138.354,91.186 138.354,87.782 141.859,87.782 141.859,91.186
  region: 138.684,126.263 138.684,123.088 141.859,123.088 141.859,126.263
  lines w0.254: 116.281,87.3 142.697,87.3 142.697,126.695 116.357,126.695 116.307,126.644 116.307,87.325 116.281,87.3 ; 144.272,86.868 170.688,86.868 170.688,126.263 144.348,126.263 144.297,126.213 144.297,86.893 144.272,86.868

## Dimensions
52.07,77.47 to 52.07,176.53 on Mechanical 1
52.07,77.47 to 176.53,77.47 on Mechanical 1